# EAGLE board SAMD21_Pro_RF_1W (EAGLE 9.0.1)
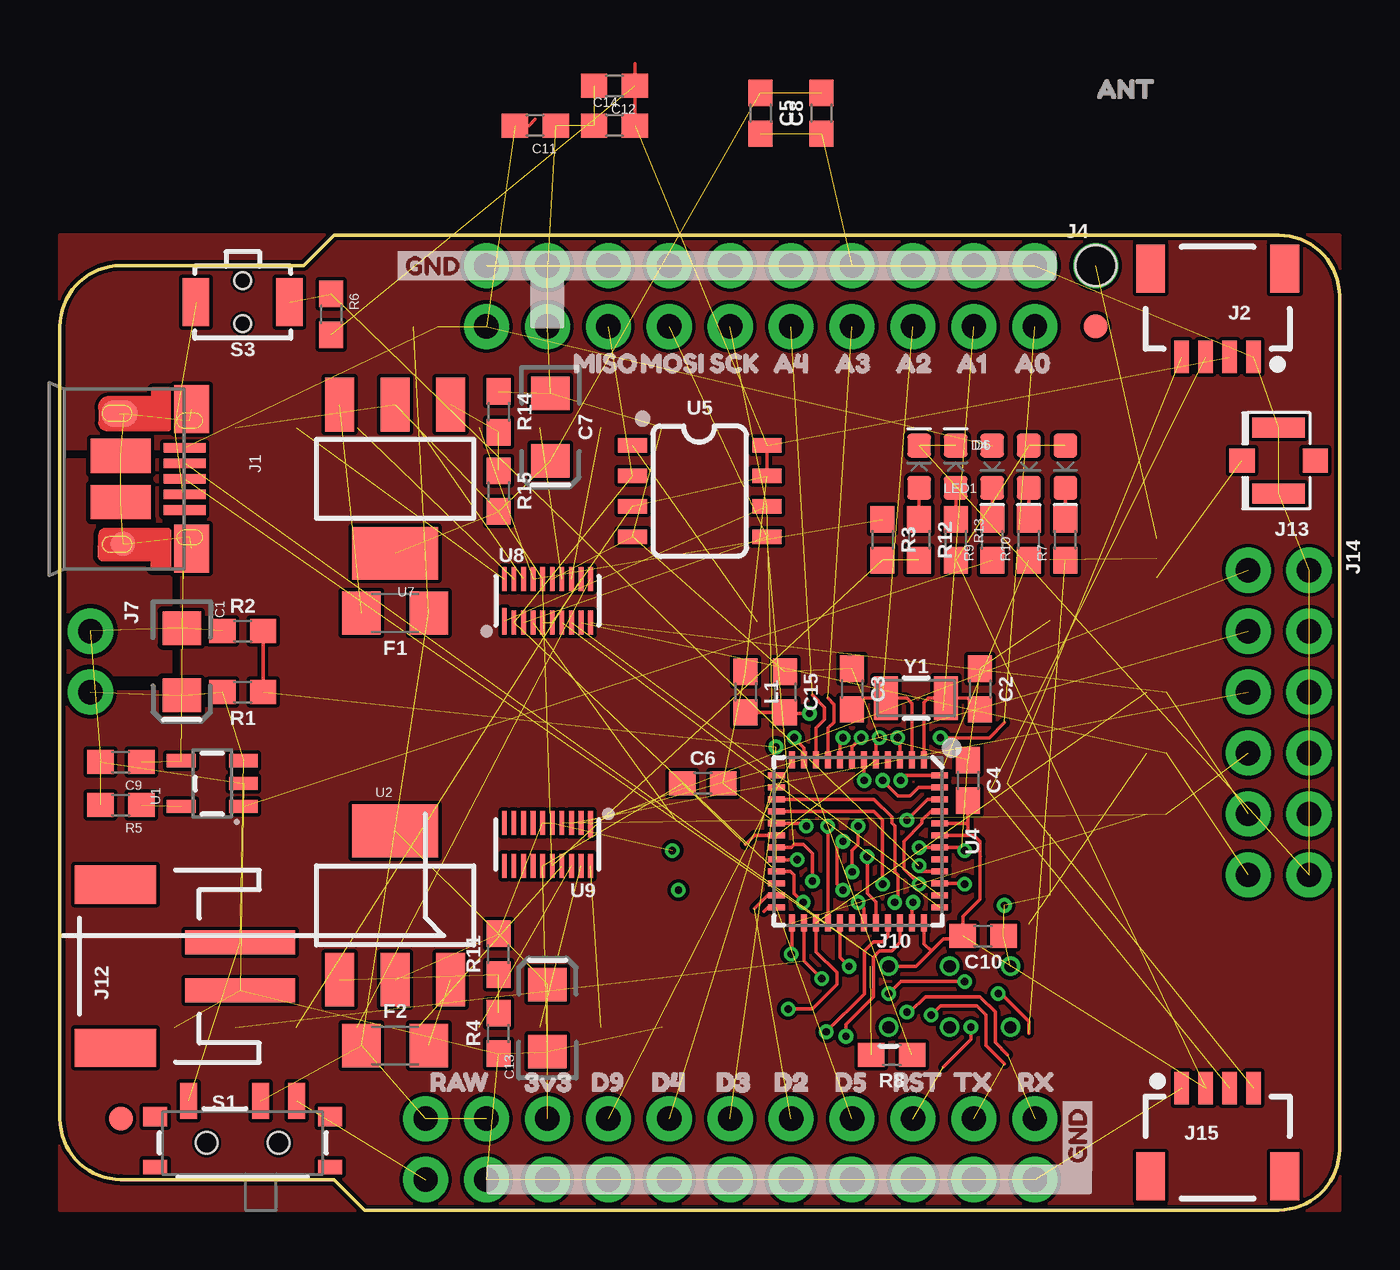
[diagram p0: board, top side]
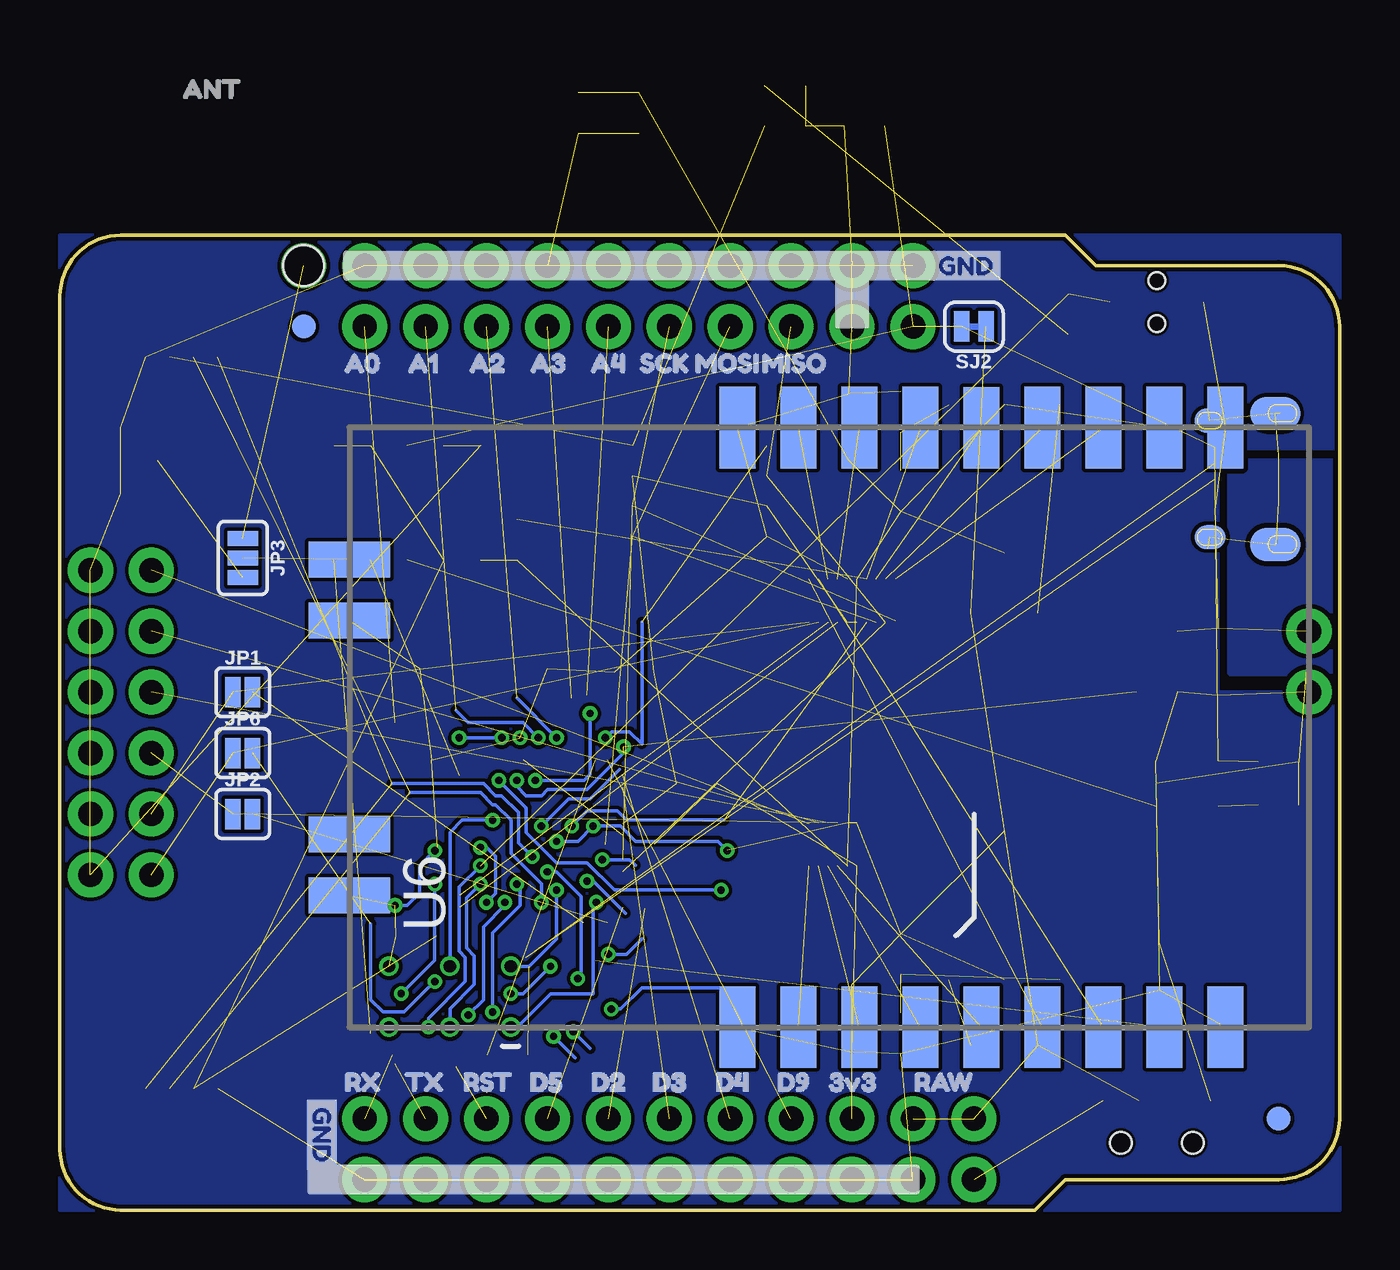
[diagram p1: board, bottom side, seen from below]

Size 53.34 x 40.64 mm. Coordinates in mm from the lower left corner, seen from the top.
Outline: 11.43,1.27 12.7,0 50.8,0 arc90 53.34,2.54 53.34,38.1 arc90 50.8,40.64 11.43,40.64 10.16,39.37 2.54,39.37 arc90 0,36.83 0,3.81 arc90 2.54,1.27 11.43,1.27
Copper layers (1*16): Top 0.035mm / dielectric 1.5mm / Bottom 0.035mm
Design rules "SparkFun-2-layer-PCBWay-LIMIT": minimum track width 6mil, minimum drill 0.3mm, track to track 6mil, track to pad 6mil, pad to pad 6mil, via to via 6mil, smd to smd 6mil, copper to edge 6mil, drill to drill 6mil, minimum pad ring 6mil, minimum via ring 6mil, stop-mask expansion 4mil, vias tented up to drill 25mil, thermal gap 10mil
Net classes: 0 default: width 0 mm, drill 0 mm; 1 vcc: width 0 mm
Holes 1.7 mm at 43.18,39.37

## Footprints (pad centres in the part's own frame; a part is rotated, then mirrored left to right if it is on the bottom)
EIA3216 = smd 1.4 x 1.6: + 1.4,0; - -1.4,0
0603 = smd 1.1 x 1: 1 -0.85,0; 2 0.85,0
LED-0603 = smd 1 x 1: A -0.877,0; C 0.877,0
1206 = smd 1.6 x 1.8: 1 -1.4,0; 2 1.4,0
FIDUCIAL-1X2 = smd 1 x 1: 1 0,0
USB-MICROB-PTH-MILL = smd 0.4 x 1.75: D+ 0,0; D- -0.65,0; GND 1.3,0; ID 0.65,0; VBUS -1.3,0 | smd 2 x 1.46: SHIELD -2.9,0.275; SHIELD2 2.9,0.275 | smd 1.425 x 2.5: SHIELD3 -0.963,-2.675; SHIELD4 0.963,-2.675 | smd 1.4 x 2.1 bottom: SHIELD5 -2.731,-2.531; SHIELD7 2.729,-2.531 | smd 1 x 1: SHIELD6 2.7,-2.575 | smd 1.1 x 1.5: SHIELD8 -2.731,-2.731 | smd 1 x 1.3 bottom: SHIELD9 -2.43,0.195; SHIELD10 2.43,0.195
1X04_1MM_RA = smd 0.6 x 1.35: 1 -1.5,0; 2 -0.5,0; 3 0.5,0; 4 1.5,0 | smd 1.2 x 2: NC1 2.8,-3.675; NC2 -2.8,-3.675
1X10_NO_SILK = drill 1.016 pad 1.88: 1 0,0; 2 2.54,0; 3 5.08,0; 4 7.62,0; 5 10.16,0; 6 12.7,0; 7 15.24,0; 8 17.78,0; 9 20.32,0; 10 22.86,0
1X01_NO_SILK = drill 1.016 pad 1.88: 1 0,0
1X09_NO_SILK = drill 1.016 pad 1.88: 1 0,0; 2 2.54,0; 3 5.08,0; 4 7.62,0; 5 10.16,0; 6 12.7,0; 7 15.24,0; 8 17.78,0; 9 20.32,0
1X02_NO_SILK = drill 1.016 pad 1.88: 1 0,0; 2 2.54,0
2X3_TEST_POINTS = drill 0.508: 1 -2.54,-1.27; 2 -2.54,1.27; 3 0,-1.27; 4 0,1.27; 5 2.54,-1.27; 6 2.54,1.27
JST-2-SMD = smd 1 x 4.6: 1 -1,-3.7; 2 1,-3.7 | smd 1.6 x 3.4: NC1 -3.4,1.5; NC2 3.4,1.5
U.FL = smd 2.2 x 0.85: 1 0,1.375; 2 0,-1.375 | smd 1.05 x 1: FEED 1.525,0; NC -1.525,0
2X6_NOSILK = drill 1.016 pad 1.88: 1 0,0; 2 0,2.54; 3 2.54,0; 4 2.54,2.54; 5 5.08,0; 6 5.08,2.54; 7 7.62,0; 8 7.62,2.54; 9 10.16,0; 10 10.16,2.54; 11 12.7,0; 12 12.7,2.54
SMT-JUMPER_2_NO_SILK = smd 0.635 x 1.27: 1 -0.406,0; 2 0.406,0
SMT-JUMPER_3_1-NC_PASTE_SILK = smd 0.635 x 1.27: 1 -0.813,0; 2 0,0; 3 0.813,0
SMT-JUMPER_2_NC_PASTE_SILK = smd 0.635 x 1.27: 1 -0.406,0; 2 0.406,0
SWITCH_SPST_SMD_A = smd 0.7 x 1.5: 1 -2.25,-1.75; 2 -0.75,-1.75; 3 2.25,-1.75 | smd 1 x 0.6: GND1 -3.65,1; GND3 3.65,1 | smd 1 x 0.8: GND2 -3.65,-1.1; GND4 3.65,-1.1 | hole 0.9: -1.5,0; 1.5,0
TACTILE_SWITCH_SMD_RIGHT_ANGLE = smd 1.1 x 2: 1 -1.95,0; 2 1.95,0 | hole 0.7: 0,0.9; 0,-0.9
SMT-JUMPER_2_NC_TRACE_SILK = smd 0.635 x 1.27: 1 -0.508,0; 2 0.508,0
SOT23-5 = smd 0.55 x 1.2: 1 -0.95,-1.3; 2 0,-1.3; 3 0.95,-1.3; 4 0.95,1.3; 5 -0.95,1.3
SOT223 = smd 1.219 x 2.235: 1 -2.311,-3.099; 2 0,-3.099; 3 2.311,-3.099 | smd 3.6 x 2.2: 4 0,3.099
QFN-48_NO_EXPOSED_PAD = smd 0.7 x 0.25: 1 -3.4,2.75; 2 -3.4,2.25; 3 -3.4,1.75; 4 -3.4,1.25; 5 -3.4,0.75; 6 -3.4,0.25; 7 -3.4,-0.25; 8 -3.4,-0.75; 9 -3.4,-1.25; 10 -3.4,-1.75; 11 -3.4,-2.25; 12 -3.4,-2.75; 25 3.4,-2.75; 26 3.4,-2.25; 27 3.4,-1.75; 28 3.4,-1.25; 29 3.4,-0.75; 30 3.4,-0.25; 31 3.4,0.25; 32 3.4,0.75; 33 3.4,1.25; 34 3.4,1.75; 35 3.4,2.25; 36 3.4,2.75 | smd 0.25 x 0.7: 13 -2.75,-3.4; 14 -2.25,-3.4; 15 -1.75,-3.4; 16 -1.25,-3.4; 17 -0.75,-3.4; 18 -0.25,-3.4; 19 0.25,-3.4; 20 0.75,-3.4; 21 1.25,-3.4; 22 1.75,-3.4; 23 2.25,-3.4; 24 2.75,-3.4; 37 2.75,3.4; 38 2.25,3.4; 39 1.75,3.4; 40 1.25,3.4; 41 0.75,3.4; 42 0.25,3.4; 43 -0.25,3.4; 44 -0.75,3.4; 45 -1.25,3.4; 46 -1.75,3.4; 47 -2.25,3.4; 48 -2.75,3.4
SO08 = smd 0.6 x 1.2: 1 -1.905,-2.8; 2 -0.635,-2.8; 3 0.635,-2.8; 4 1.905,-2.8; 5 1.905,2.8; 6 0.635,2.8; 7 -0.635,2.8; 8 -1.905,2.8
E19-915MS1W = smd 3.4 x 1.5: P$1 0,23.82; P$2 0,21.28; P$3 0,18.74; P$4 0,16.2; P$5 0,13.66; P$6 0,11.12; P$7 0,8.58; P$8 0,6.04; P$9 0,3.5; P$10 25,3.5; P$11 25,6.04; P$12 25,8.58; P$13 25,11.12; P$14 24.98,13.66; P$15 25,16.2; P$16 25,18.74; P$17 25,21.28; P$18 25,23.82 | smd 1.5 x 3.4: P$19 19.5,40; P$20 16.96,40; P$21 8.04,40; P$22 5.5,40
UFDFN-20 = smd 0.2 x 1.1: 1 -1.8,-0.85 | smd 0.2 x 1: 2 -1.4,-0.9; 3 -1,-0.9; 4 -0.6,-0.9; 5 -0.2,-0.9; 6 0.2,-0.9; 7 0.6,-0.9; 8 1,-0.9; 9 1.4,-0.9; 10 1.8,-0.9; 11 1.8,0.9; 12 1.4,0.9; 13 1,0.9; 14 0.6,0.9; 15 0.2,0.9; 16 -0.2,0.9; 17 -0.6,0.9; 18 -1,0.9; 19 -1.4,0.9; 20 -1.8,0.9
CRYSTAL-SMD-3.2X1.5MM = smd 1 x 1.8: P$1 -1.25,0; P$2 1.25,0

## Placement (x,y rotation side)
C1  10uF  [EIA3216]  5.08,22.86 270 top
C2  15pF  [0603]  38.35,21.72 270 top
C3  15pF  [0603]  33.02,21.72 270 top
C4  0.1uF  [0603]  37.85,17.91 270 top
C5  1.0uF  [0603]  29.21,45.72 270 top  (outside the outline)
C6  0.1uF  [0603]  26.8,17.78 0 top
C7  10uF  [EIA3216]  20.45,32.64 270 top
C8  0.1uF  [0603]  31.75,45.72 90 top  (outside the outline)
C9  4.7uF  [0603]  2.54,18.67 180 top
C10  0.1uF  [0603]  38.48,11.43 180 top
C11  0.1uF  [0603]  19.81,45.21 180 top  (outside the outline)
C12  1.0uF  [0603]  23.11,46.86 180 top  (outside the outline)
C13  10uF  [EIA3216]  20.32,8 90 top
C14  0.1uF  [0603]  23.11,45.21 0 top  (outside the outline)
C15  0.1uF  [0603]  30.23,21.59 270 top
D1  Green  [LED-0603]  41.91,30.99 270 top
D4  Yellow  [LED-0603]  38.86,30.99 270 top
D6  Yellow  [LED-0603]  40.39,30.99 270 top
F1  6V/0.75A  [1206]  13.97,24.89 180 top
F2  6V/0.75A  [1206]  13.97,6.86 0 top
FD1  FIDUCIAL1X2  [FIDUCIAL-1X2]  2.54,3.81 0 bottom
FD2  FIDUCIAL1X2  [FIDUCIAL-1X2]  43.18,36.83 0 bottom
FD3  FIDUCIAL1X2  [FIDUCIAL-1X2]  2.54,3.81 0 top
FD4  FIDUCIAL1X2  [FIDUCIAL-1X2]  43.18,36.83 0 top
FRAME2  FRAME-LEDGER  [CREATIVE_COMMONS]  -13.97,-12.7 0 top  (outside the outline)
J1  [USB-MICROB-PTH-MILL]  5.21,30.48 270 top
J2  [1X04_1MM_RA]  48.26,35.56 180 top
J3  [1X10_NO_SILK]  17.78,3.81 0 top
J4  [1X01_NO_SILK]  43.18,39.37 0 top
J5  [1X09_NO_SILK]  20.32,39.37 0 top
J6  [1X10_NO_SILK]  17.78,1.27 0 top
J7  PTH  [1X02_NO_SILK]  1.27,24.13 270 top
J8  [1X02_NO_SILK]  17.78,39.37 270 top
J9  External On/Off  [1X02_NO_SILK]  15.24,3.81 270 top
J10  AVR_SPI_PROG_3X2TESTPOINTS  [2X3_TEST_POINTS]  37.08,8.89 0 top
J11  [1X09_NO_SILK]  20.32,36.83 0 top
J12  JST  [JST-2-SMD]  3.81,10.16 90 top
J13  U.FL  [U.FL]  50.8,31.24 180 top
J14  RFM_DIO  [2X6_NOSILK]  49.53,26.67 270 top
J15  [1X04_1MM_RA]  48.26,5.08 0 top
JP1  [SMT-JUMPER_2_NO_SILK]  45.72,21.59 0 bottom
JP2  [SMT-JUMPER_2_NO_SILK]  45.72,16.51 0 bottom
JP3  JUMPER-SMT_3_1-NC_PASTE_SILK  [SMT-JUMPER_3_1-NC_PASTE_SILK]  45.72,27.18 270 bottom
JP6  JUMPER-SMT_2_NC_PASTE_SILK  [SMT-JUMPER_2_NC_PASTE_SILK]  45.72,19.05 0 bottom
L1  [0603]  28.57,21.59 270 top
LED1  RED  [LED-0603]  37.34,30.99 90 top
LED2  RED  [LED-0603]  35.81,30.99 90 top
LOGO1  OSHW-LOGOMINI  [OSHW-LOGO-MINI]  -14.1,24.13 0 bottom  (outside the outline)
R1  10k  [0603]  7.62,21.59 180 top
R2  10k  [0603]  7.62,24.13 0 top
R3  10k  [0603]  34.29,27.94 270 top
R4  787  [0603]  18.29,7.37 90 top
R5  2.0k  [0603]  2.54,16.89 180 top
R6  10k  [0603]  11.3,37.34 270 top
R7  1k  [0603]  41.91,27.94 90 top
R8  10k  [0603]  34.67,6.48 180 top
R9  1k  [0603]  38.86,27.94 90 top
R10  1k  [0603]  40.39,27.94 90 top
R11  470  [0603]  18.29,10.67 90 top
R12  1k  [0603]  35.81,27.94 270 top
R13  1k  [0603]  37.34,27.94 270 top
R14  715  [0603]  18.29,33.27 270 top
R15  240  [0603]  18.29,29.97 270 top
S1  Power  [SWITCH_SPST_SMD_A]  7.62,2.79 180 top
S3  [TACTILE_SWITCH_SMD_RIGHT_ANGLE]  7.62,37.85 180 top
SJ2  USB Power  [SMT-JUMPER_2_NC_TRACE_SILK]  15.24,36.83 180 bottom
U1  MCP73831  [SOT23-5]  6.35,17.78 90 top
U2  ADJ3.3  [SOT223]  13.97,12.7 0 top
U4  ATSAMD21G  [QFN-48_NO_EXPOSED_PAD]  33.27,15.37 270 top
U5  4MB Flash  [SO08]  26.67,29.97 270 top
U6  E19-915MS1W  [E19-915MS1W]  1.27,7.62 90 bottom
U7  ADJ5  [SOT223]  13.97,30.48 180 top
U8  TXB0108DQSR  [UFDFN-20]  20.32,25.4 0 top
U9  TXB0108DQSR  [UFDFN-20]  20.32,15.24 180 top
U$1  [SAMD21_PRO_RF0]  -22.1,-2.54 0 top  (outside the outline)
U$2  [D20]  31.88,5.33 0 bottom
U$3  [A43]  29.08,35.31 0 top
U$4  [A34]  31.62,35.31 0 top
U$5  [A25]  34.16,35.31 0 top
U$6  [A16]  36.7,35.31 0 top
U$7  [A07]  39.12,35.31 0 top
U$8  [MISO8]  20.7,35.31 0 top
U$9  [MOSI9]  23.5,35.31 0 top
U$10  [SCK10]  26.42,35.31 0 top
U$11  [ANT11]  42.55,46.74 0 top  (outside the outline)
U$12  [GND0]  13.72,39.37 0 top
U$13  [RST2]  34.04,5.33 0 top
U$14  [CHG1]  -5.71,35.31 0 top  (outside the outline)
U$15  [D90]  21.46,5.33 0 top
U$16  [D90]  24.13,5.33 0 bottom
U$17  [GND0]  42.42,4.95 270 bottom
U$18  [D20]  29.08,5.33 0 top
U$19  [RX2]  42.16,5.33 0 bottom
U$20  [D30]  26.67,5.33 0 top
U$21  [D30]  29.34,5.33 0 bottom
U$22  [D40]  24,5.33 0 top
U$23  [3V320]  18.67,5.33 0 top
U$24  [RAW21]  14.73,5.33 0 top
U$25  [LORA0]  -13.46,5.21 0 bottom  (outside the outline)
U$26  SPECIAL_INSTRUCTIONS-ORDERING  [ORDERING_INSTRUCTIONS]  -34.29,-13.97 0 top  (outside the outline)
U$27  [SWITCH23]  -28.32,-1.4 90 top  (outside the outline)
U$28  [RST2]  -29.59,25.53 0 top  (outside the outline)
U$29  [BATT25]  -26.29,9.27 90 top  (outside the outline)
U$30  [QWIIC-LOGO-MEDIUM]  -14.73,16.76 0 bottom  (outside the outline)
U$31  [D40]  26.67,5.33 0 bottom
U$32  [BATT25]  -26.29,12.32 270 bottom  (outside the outline)
U$33  [D50]  34.42,5.33 0 bottom
U$34  SPARKX-LOGO2  [SPARKX-TINY]  -8.76,20.83 90 top  (outside the outline)
U$35  [WAN1]  -16.89,5.21 0 bottom  (outside the outline)
U$36  [RST2]  -26.29,25.15 0 bottom  (outside the outline)
U$37  [SWITCH23]  -28.32,3.94 270 bottom  (outside the outline)
U$38  [GND0]  17.4,39.37 0 bottom
U$39  [ON#OFF0]  -30.23,-0.64 0 bottom  (outside the outline)
U$40  [CHG1]  -1.91,35.31 0 bottom
U$41  [RST2]  37.21,5.33 0 bottom
U$42  [A43]  31.88,35.31 0 bottom
U$43  [A34]  34.42,35.31 0 bottom
U$44  [A25]  36.96,35.31 0 bottom
U$45  [A16]  39.5,35.31 0 bottom
U$46  [A07]  42.16,35.31 0 bottom
U$47  [MISO8]  24.77,35.31 0 bottom
U$48  [MOSI9]  27.56,35.31 0 bottom
U$49  [SCK10]  29.84,35.31 0 bottom
U$50  [ANT11]  48.9,46.74 0 bottom  (outside the outline)
U$51  [SPARKX-MEDIUM]  -14.61,29.34 0 bottom  (outside the outline)
U$52  [RAW21]  18.41,5.33 0 bottom
U$53  [3V320]  21.97,5.33 0 bottom
U$54  [ANT0]  -12.32,44.83 270 bottom  (outside the outline)
U$55  [D514]  31.62,5.33 0 top
U$56  [U#FL0]  -15.62,44.83 270 bottom  (outside the outline)
U$57  [TX3]  39.62,5.33 0 bottom
U$58  [CUT_IF_RAW_IN0]  -42.42,14.61 270 bottom  (outside the outline)
U$59  [GREATER_THAN_5#5V0]  -38.61,14.1 270 bottom  (outside the outline)
U$60  [QWIIC-TEXT-04]  -10.29,16 0 top  (outside the outline)
U$61  [OSHW-LOGO-MINI]  -14.1,24.13 0 top  (outside the outline)
U$62  [GND0]  42.42,1.27 90 top
U$63  [PWR-()-03]  -11.81,5.71 0 top  (outside the outline)
U$65  [CHG1]  -11.81,7.37 0 top  (outside the outline)
U$69  [TX3]  36.58,5.33 0 top
U$70  [TX6]  -11.81,2.67 0 top  (outside the outline)
U$72  [RX7]  -11.81,4.06 0 top  (outside the outline)
U$73  [RX2]  39.24,5.33 0 top
Y1  32.768kHz  [CRYSTAL-SMD-3.2X1.5MM]  35.69,21.34 0 top

## Library data of the parts
C1 C7 C13 = SparkFun-Capacitors; PROD_ID: CAP-00811
C2 C3 = SparkFun-Capacitors; PROD_ID: CAP-07881
C4 C6 C8 C10 C11 C14 C15 = SparkFun-Capacitors; PROD_ID: CAP-00810
C5 C12 = SparkFun-Capacitors; PROD_ID: CAP-00868
C9 = SparkFun-Capacitors; PROD_ID: CAP-08280
D1 = SparkFun-LED; PROD_ID: DIO-00821
D4 D6 = SparkFun-LED; PROD_ID: DIO-09003
F1 F2 = SparkFun-Fuses; PROD_ID: RES-11150
FD1-FD4 FRAME2 LOGO1 U$26 U$61 = SparkFun-Aesthetics
J1 = SparkFun-Connectors; PROD_ID: CONN-13711
J2 J15 = SparkFun-Connectors; PROD_ID: CONN-13694
J3 J6 = SparkFun-Connectors; PROD_ID: CONN-11563
J4 J5 J7-J11 J14 = SparkFun-Connectors
J12 = SparkFun-Connectors; PROD_ID: CONN-11443
J13 = SparkFun-Connectors; PROD_ID: CONN-09193; SF_ID: WRL-09144
JP1-JP3 JP6 SJ2 = SparkFun-Jumpers
L1 = SparkFun-Coils; PROD_ID: NDUC-07859
LED1 LED2 = SparkFun-LED; PROD_ID: DIO-00819
R1-R3 R6 R8 = SparkFun-Resistors; PROD_ID: RES-00824
R4 = SparkFun-Resistors; PROD_ID: RES-11228
R5 = SparkFun-Resistors; PROD_ID: RES-08296
R7 R9 R10 R12 R13 = SparkFun-Resistors; PROD_ID: RES-07856
R11 = SparkFun-Resistors; PROD_ID: RES-07869
R14 = SparkFun-Resistors; PROD_ID: RES-07850
R15 = SparkFun-Resistors; PROD_ID: RES-07849
S1 = SparkFun-Switches; PROD_ID: SWCH-10651; SF_SKU: COM-10860
S3 = SparkFun-Switches; PROD_ID: COMP-12265
U1 = SparkFun-IC-Power; PROD_ID: IC-09995
U2 U7 = SparkFun-IC-Power; PROD_ID: VREG-08170
U4 = temp
U5 = SparkFun-IC-Memory; PROD_ID: IC-12455
U6 = SAMD21_ProRF_1W
U8 U9 = SparkFun-IC-Comms; PROD_ID: IC-12292
U$1 = SAMD21
U$2 U$18 = D2
U$3-U$14 U$17 U$23 U$24 U$27-U$29 U$32 U$36-U$38 U$40-U$50 U$52 U$53 U$55 U$62 = buzzard_labels (25)
U$15 U$16 = buzzard_labels (10)
U$19 U$57 U$69 U$70 U$72 U$73 = buzzard_labels (8)
U$20 U$21 = D3
U$22 U$31 = D4
U$25 U$35 = buzzard_labels (3)
U$30 U$60 U$63 = Labels
U$33 = D5
U$34 U$51 = SparkX
U$39 = buzzard_labels (28)
U$54 = ANT
U$56 = ufl
U$58 = CUTIFRAW
U$59 = GREATER
U$65 = buzzard_labels (9)
Y1 = SparkFun-Clocks; PROD_ID: XTAL-13062

## Nets
3.3V [vcc]: C4.2 C6.2 C10.2 C12.1 C13.+ C14.2 D1.A D6.A J2.2 J3.2 J10.2 J15.2 L1.1 R6.2 R8.2 R11.2 R13.2 U2.2 U2.4 U4.17 U4.36 U4.43 U4.44 U5.3 U5.7 U5.8 U8.5 U8.6 U9.5 U9.6
5V [vcc]: C5.1 C7.+ C8.2 R3.2 R12.2 R15.2 U6.P$11 U7.2 U7.4 U8.16 U9.16
!RFM_CS: U4.28 U8.4
!RFM_CS5V: R3.1 U6.P$15 U8.17
!RST: J3.8 J10.5 R6.1 S3.1 U4.40
A0: J11.9 U4.3
A1: J11.8 U4.7
A2: J11.7 U4.8
A3: J11.6 U4.9
A4: J11.5 U4.10
ANT: JP3.2 U6.P$19
ANT_HEADER: J4.1 JP3.1
CHARGE_STAT: R9.1 U1.1
D2: J3.6 U4.23
D3: J3.5 U4.14
D4: J3.4 U4.13
D5: J3.7 U4.24
D8_!FLASH_CS: R8.1 U4.11 U5.1
D9: J3.3 U4.12
D10: JP1.2 U4.27
D11: JP2.2 U4.25
D+: J1.D+ U4.34
D-: J1.D- U4.33
DIO0: J14.11 JP6.1 U8.9
DIO1: J14.9 JP1.1 U8.10
DIO2: J14.7 JP2.1 U9.4
DIO3: J14.5 U9.3
DIO4: J14.3 U9.2
DIO5: J14.1 U9.1
DIO05V: U6.P$7 U8.12
DIO15V: U6.P$6 U8.11
DIO25V: U6.P$5 U9.17
DIO35V: U6.P$4 U9.18
DIO45V: U6.P$3 U9.19
DIO55V: U6.P$2 U9.20
GND: C1.- C2.1 C3.1 C4.1 C5.2 C6.1 C7.- C8.1 C9.2 C10.1 C11.1 C12.2 C13.- C14.1 C15.1 J1.GND J2.1 J5.1 J5.2 J5.3 J5.4 J5.5 J5.6 J5.7 J5.8 J5.9 J6.1 J6.2 J6.3 J6.4 J6.5 J6.6 J6.7 J6.8 J6.9 J6.10 J7.1 J8.1 J10.6 J11.1 J12.1 J13.1 J13.2 J14.2 J14.4 J14.6 J14.8 J14.10 J14.12 J15.1 LED1.C LED2.C R2.1 R4.1 R5.2 R14.1 S3.2 U1.2 U4.5 U4.18 U4.35 U4.42 U5.4 U6.P$1 U6.P$9 U6.P$10 U6.P$18 U6.P$20 U6.P$21 U6.P$22 U8.15 U9.15
MISO: J10.1 J11.2 U4.21 U5.2 U8.2
MISO5V: U6.P$13 U8.19
MOSI: J11.3 U4.19 U5.5 U8.3
MOSI5V: U6.P$14 U8.18
N$1: D6.C R10.2
N$2: D1.C R7.2
N$3: J13.FEED JP3.3
N$4 [vcc]: F2.2 U2.3
N$5: R4.2 R11.1 U2.1
N$6: C2.2 U4.1 Y1.P$2
N$7: C3.2 U4.2 Y1.P$1
N$8: D4.C R9.2
N$9: J9.2 S1.1
N$10: LED2.A R12.1
N$11: R5.1 U1.5
N$12 [vcc]: F1.2 U7.3
N$13: R14.2 R15.1 U7.1
N$38: LED1.A R13.1
RAW [vcc]: F1.1 F2.1 J3.1 J9.1 S1.2 SJ2.1
RFM_INT: JP6.2 U4.29
RFM_RST: U4.26 U6.P$8
RFM_RXEN: U4.38 U8.8
RFM_RXEN5V: U6.P$17 U8.13
RFM_TXEN: U4.37 U8.7
RFM_TXEN5V: U6.P$16 U8.14
RX_LED: R10.1 U4.48
RXI: J3.10 U4.16
SCK: J11.4 U4.20 U5.6 U8.1
SCK5V: U6.P$12 U8.20
SCL: J2.4 J15.4 U4.32
SDA: J2.3 J15.3 U4.31
SHLD: J1.SHIELD J1.SHIELD2 J1.SHIELD3 J1.SHIELD4 J1.SHIELD5 J1.SHIELD6 J1.SHIELD7 J1.SHIELD8 J1.SHIELD9 J1.SHIELD10
SWDCLK: J10.3 U4.45
SWDIO: J10.4 U4.46
TX_LED: R7.1 U4.39
TXO: J3.9 U4.15
USB_VCC [vcc]: C9.1 C11.2 D4.A J1.VBUS J8.2 SJ2.2 U1.4
VBATT: C1.+ J7.2 J12.2 R1.2 S1.3 U1.3
VBATT_LVL: R1.1 R2.2 U4.47
VDDANA [vcc]: C15.2 L1.2 U4.6

## Tracks (layer width: path | path; a pad name or v marks a point on that pad's centre or on a via)
3.3V  (via drill 0.3)  (21 unrouted)
  Top 0.152: 37.85,15.62 U4.43 | 23.96,47.79 C12.1 C14.2 | U5.7 U5.8 | U4.17 31,16.12 v31.11,16 | v32.64,13.34 32.38,13.59 32.38,15.11 v32.64,15.37 | 37.85,15.62 38.1,15.62 38.35,15.37 38.35,14.73 | J10.2 35.69,10.16 36.32,10.79 | 36.32,10.79 36.83,11.3 37.5,11.3 C10.2 37.63,12.23 38.35,12.95 38.35,14.73 | U4.36 36.02,11.09 36.32,10.79 | C4.2 37.85,16.13 | 37.85,16.13 37.85,15.62 | U4.44 37.83,16.12 37.85,16.13 | 38.35,14.73 38.36,14.74
  Bottom 0.152: v25.53,14.99 25.91,15.37 29.34,15.37 29.97,16 v31.11,16 31.75,15.37 v32.64,15.37 | J10.2 33.78,10.16 32.64,11.3 v32.64,13.34
5V  (10 unrouted)
!RFM_CS  (via drill 0.3)  (1 unrouted)
  Top 0.152: v32,16 32.02,15.98 U4.28
  Bottom 0.152: v32,16 31.37,16.64 30.1,16.64 29.72,16.26 25.65,16.26
!RFM_CS5V  (2 unrouted)
!RST  (via drill 0.3)  (3 unrouted)
  Top 0.152: 36.83,5.97 37.97,7.11 v37.97,7.62 | U4.40 35.92,14.12 35.81,14.22 v35.81,14.35
  Bottom 0.152: J10.5 v37.97,7.62 37.97,8 36.45,9.53 36.45,10.54 36.7,10.79 36.7,13.46 v35.81,14.35
A0  (via drill 0.3)  (1 unrouted)
  Top 0.152: U4.3 35.02,19.59 v34.92,19.68 | v36.7,19.68 38.73,19.68 39.37,20.32
  Bottom 0.152: v34.92,19.68 v36.7,19.68
A1  (via drill 0.3)  (1 unrouted)
  Top 0.152: U4.7 33.02,19.31 v33.4,19.68
  Bottom 0.152: v33.4,19.68 34.04,20.32 36.32,20.32 36.83,20.83
A2  (via drill 0.3)  (1 unrouted)
  Top 0.152: U4.8 32.52,19.57 v32.64,19.68
  Bottom 0.152: v32.64,19.68 34.29,21.34
A3  (1 unrouted)
  Top 0.152: U4.9 32.02,20.09 32.26,20.32 32.26,21.08 32,21.34
A4  (1 unrouted)
  Top 0.152: U4.10 31.52,20.09 31.88,20.45 31.88,20.95 31.37,21.46
ANT  (1 unrouted)
ANT_HEADER  (1 unrouted)
CHARGE_STAT  (1 unrouted)
D2  (1 unrouted)
  Top 0.152: U4.23 29.5,13.12 28.96,12.57
D3  (1 unrouted)
D4  (1 unrouted)
D5  (1 unrouted)
  Top 0.152: U4.24 29.51,12.62 29.34,12.45
D8_!FLASH_CS  (via drill 0.3)  (2 unrouted)
  Top 0.152: U4.11 31.02,19.27 v30.61,19.68
  Bottom 0.152: 29.08,24.51 29.08,19.43 29.59,19.94 30.35,19.94 v30.61,19.68
D9  (1 unrouted)
D10  (via drill 0.3)  (1 unrouted)
  Top 0.152: v30.35,8.38 31.37,8.38 32.38,9.4 32.38,9.91 31.52,10.77 U4.27
  Bottom 0.152: 25.68,9.27 29.08,9.27 29.97,8.38 v30.35,8.38
D11  (via drill 0.3)  (1 unrouted)
  Top 0.152: v30.48,10.67 30.52,10.71 U4.25
  Bottom 0.152: 29.08,11.3 29.72,10.67 v30.48,10.67
D+  (via drill 0.3)  (1 unrouted)
  Top 0.152: U4.34 35.02,11.15 34.67,10.79 34.16,10.79 33.91,10.54 33.91,8.89 32.77,7.75 v32.77,7.24
  Bottom 0.152: 31.88,6.35 v32.77,7.24
D-  (via drill 0.3)  (1 unrouted)
  Top 0.152: U4.33 34.52,11.41 34.29,11.18 33.91,11.18 33.53,10.79 33.53,9.02 v31.94,7.43
  Bottom 0.152: 31.24,6.73 v31.94,7.43
DIO0  (2 unrouted)
DIO1  (2 unrouted)
DIO2  (2 unrouted)
DIO3  (1 unrouted)
DIO4  (1 unrouted)
DIO5  (1 unrouted)
DIO05V  (1 unrouted)
DIO15V  (1 unrouted)
DIO25V  (1 unrouted)
DIO35V  (1 unrouted)
DIO45V  (1 unrouted)
DIO55V  (1 unrouted)
GND  (via drill 0.3)  (70 unrouted)
  Top 0.152: v37.72,14.99 37.59,15.12 U4.42 v35.82,15.12 v35.81,15.11 | U4.35 35.52,12.79 v35.56,12.83 | U4.18 28.95,15.62 28.57,15.24 | U4.5 34.02,19.55 v34.16,19.68
  Bottom 0.152: v37.72,14.99 38.35,14.35 38.35,13.21 38.86,12.7 v39.37,12.7 | v35.56,12.83 35.18,13.21 35.18,14.73 35.56,15.11 v35.81,15.11
GND1
  pour Bottom (isolate 0.152): 0,40.64 53.34,40.64 53.34,0 0,0 0,21.59 5.08,21.59 5.08,31.75 0,31.75
  pour Top (isolate 0.152): 53.34,40.64 0,40.64 0,31.75 5.08,31.75 5.08,21.59 0,21.59 0,0 53.34,0
MISO  (via drill 0.3)  (3 unrouted)
  Top 0.152: U4.21 30.46,14.12 30.61,13.97 30.61,13.21 v30.99,12.83
  Bottom 0.152: J10.1 34.29,7.62 32.89,9.02 31.11,9.02 31.11,12.7 v30.99,12.83
MISO5V  (1 unrouted)
MOSI  (via drill 0.3)  (3 unrouted)
  Top 0.152: U4.19 30.48,15.12 30.61,15.24 30.99,15.24 31.37,14.86 v31.37,13.72
  Bottom 0.152: 29.77,12.37 31.11,13.72 v31.37,13.72
MOSI5V  (1 unrouted)
N$1
  Top 0.152: R10.2 D6.C
N$2
  Top 0.152: R7.2 D1.C
N$3  (1 unrouted)
N$4  (1 unrouted)
N$5  (2 unrouted)
N$6
  Top 0.152: U4.1 36.02,21.16 36.2,21.34 Y1.P$2 37.88,21.34 C2.2
N$7
  Top 0.152: U4.2 35.52,21.12 35.31,21.34 Y1.P$1 33.49,21.34 C3.2
N$8
  Top 0.152: D4.C R9.2
N$9  (1 unrouted)
N$10
  Top 0.152: R12.1 LED2.A
N$11  (1 unrouted)
N$12  (1 unrouted)
N$13  (2 unrouted)
N$38
  Top 0.152: R13.1 LED1.A
RAW  (5 unrouted)
RFM_INT  (via drill 0.3)  (1 unrouted)
  Top 0.152: U4.29 32.52,10.53 v32.89,10.16 | v34.54,9.02 35.05,9.53 v37.72,9.53
  Bottom 0.152: v32.89,10.16 34.04,9.02 v34.54,9.02 | v37.72,9.53 38.99,8.26 39.88,8.26 40.39,8.76 40.39,11.94
RFM_RST  (via drill 0.3)  (1 unrouted)
  Top 0.152: v33.27,16 33.27,15.24 33.02,14.99 v33.02,14.1 | v31.75,9.65 31.02,10.38 U4.26
  Bottom 0.152: 30.02,18.37 31.24,17.14 32.13,17.14 v33.27,16 | v33.02,14.1 32.64,14.1 31.62,13.08 31.62,9.78 v31.75,9.65
RFM_RXEN  (1 unrouted)
RFM_RXEN5V  (1 unrouted)
RFM_TXEN  (1 unrouted)
RFM_TXEN5V  (1 unrouted)
RX_LED  (via drill 0.3)  (1 unrouted)
  Top 0.152: U4.48 35.26,18.12 v35.05,17.91
  Bottom 0.152: v25.78,13.34 30.23,13.34 31.37,14.48 32.64,14.48 33.91,15.75 33.91,16.76 v35.05,17.91
RXI  (via drill 0.3)  (1 unrouted)
  Top 0.152: U4.16 33.93,16.62 34.29,16.26 v34.29,13.59 | 39.5,6.48 38.99,6.99 38.99,8.26 38.35,8.89 36.07,8.89 35.43,8.26 v35.31,8.26
  Bottom 0.152: v35.31,8.26 35.31,11.56 34.16,12.7 34.16,13.46 v34.29,13.59
SCK  (via drill 0.3)  (3 unrouted)
  Top 0.152: v30.73,14.61 29.89,14.61 U4.20
  Bottom 0.152: 29.35,14.37 29.59,14.61 v30.73,14.61
SCK5V  (1 unrouted)
SCL  (via drill 0.3)  (2 unrouted)
  Top 0.152: U4.32 34.02,12.84 33.66,13.21 v33.66,14.73
  Bottom 0.152: 39.5,17.78 35.69,17.78 35.18,17.27 34.92,17.27 34.23,16.57 34.23,15.3 v33.66,14.73
SDA  (via drill 0.3)  (2 unrouted)
  Top 0.152: U4.31 33.52,12.58 v33.27,12.83
  Bottom 0.152: 38.73,17.4 35.81,17.4 35.31,16.89 35.18,16.89 34.54,16.26 34.54,14.86 33.27,13.59 v33.27,12.83
SHLD  (9 unrouted)
SHLD1
  pour Top (isolate 0.203): 0,31.24 4.57,31.24 4.57,22.35 0,22.35
  pour Bottom (isolate 0.203): 4.57,31.24 0,31.24 0,22.35 4.57,22.35
SWDCLK  (via drill 0.3)
  Top 0.152: v35.81,13.59 35.18,14.22 35.18,15.37 35.94,16.13 35.94,16.26 36.3,16.62 U4.45
  Bottom 0.152: J10.3 37.08,8.38 36.07,9.4 36.07,10.59 36.4,10.92 36.4,13.01 v35.81,13.59
SWDIO  (via drill 0.3)
  Top 0.152: v35.31,16.26 36.17,17.12 U4.46
  Bottom 0.152: J10.4 37.08,15.75 36.58,16.26 v35.31,16.26
TX_LED  (via drill 0.3)  (1 unrouted)
  Top 0.152: U4.39 37.69,13.62 v37.72,13.59 | 40.39,7.37 40.39,7.87 39.24,9.02 v39.12,9.02
  Bottom 0.152: v39.12,9.02 37.72,10.41 v37.72,13.59
TXO  (via drill 0.3)  (1 unrouted)
  Top 0.152: U4.15 33.94,17.12 34.67,16.38 34.67,16.13 34.8,16 34.8,14.1 34.92,13.97 34.92,12.95 v34.8,12.83 | 39.37,6.1 38.61,6.86 38.61,8.13 38.23,8.51 36.7,8.51 v36.32,8.13
  Bottom 0.152: v36.32,8.13 35.69,8.76 35.69,11.81 34.8,12.7 v34.8,12.83
USB_VCC  (6 unrouted)
  Top 0.152: C11.2 19.56,45.21 19.81,45.47
VBATT  (5 unrouted)
VBATT_LVL  (via drill 0.3)  (2 unrouted)
  Top 0.152: R1.1 R2.2 | v34.29,17.91 34.92,17.27 35.43,17.27 35.78,17.62 U4.47
  Bottom 0.152: v34.29,17.91 34.29,17.65 33.91,17.27 33.27,17.27 33.02,17.53 31.37,17.53 29.84,19.05
  other vias: 29.84,19.3
VDDANA  (via drill 0.3)
  Top 0.152: U4.6 v33.52,17.91 v33.53,17.91 | v31.24,20.7 30.27,20.7 C15.2 L1.2
  Bottom 0.152: v33.53,17.91 31.5,17.91 31.24,18.16 v31.24,20.7

## Text on the board
Bottom: x01
tPlace: + | -
bPlace: + | -
bValues: RFM69 / or / RFM95W
tDocu: Owen Lyke | 0.8mm Board Thickness